# Altium PCB main.PcbDoc
Units mil, origin at the board's own origin, x right, y up, seen from the top; angles counter-clockwise.
Board outline 6000 x 4000 mil, 2 copper layers (Top Layer, Bottom Layer); 46 components, 28 nets, 221 pads, 4 vias.
Unrouted connection lines stored in the file: 115.
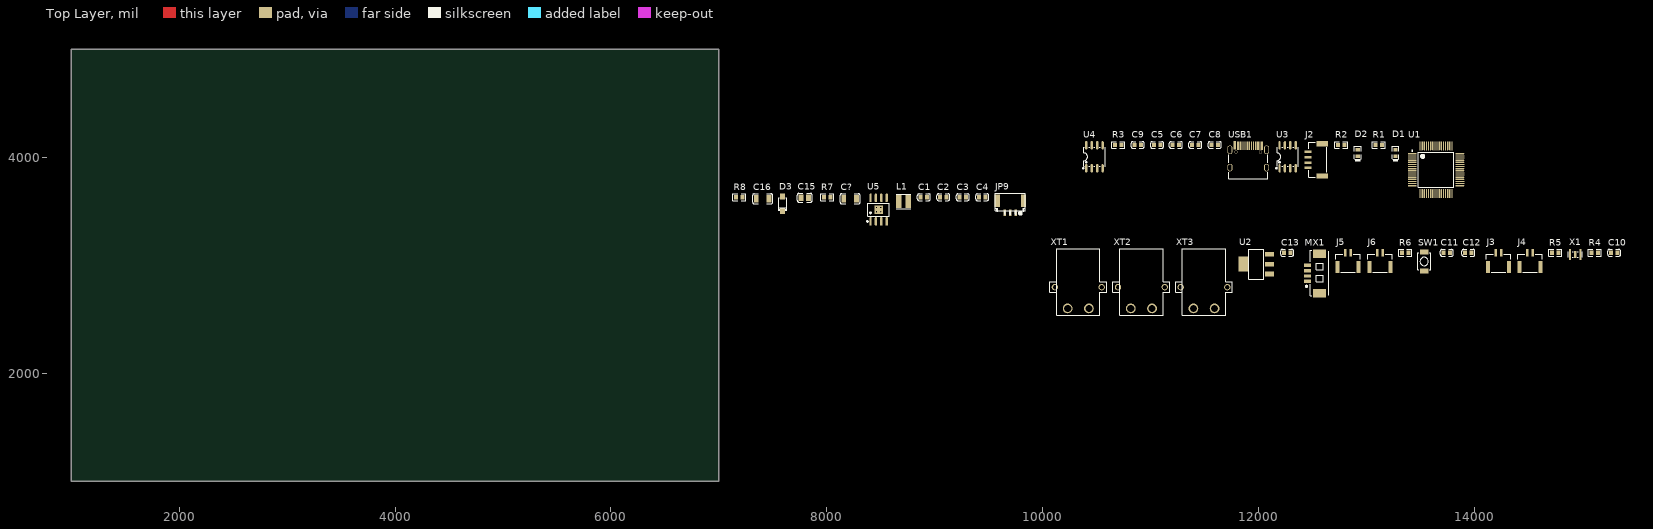
[diagram p0: Top Layer view]
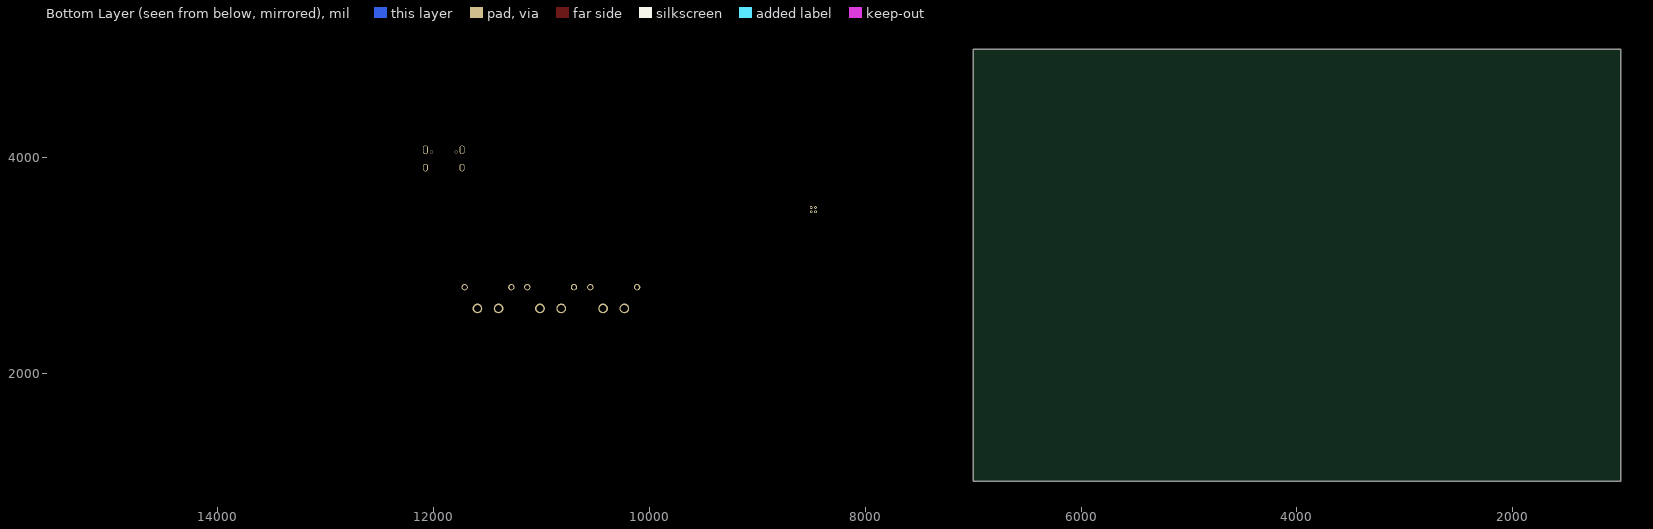
[diagram p1: Bottom Layer view, seen from below]

## Layer stack, top to bottom
Top Solder: solder mask 0.4, Solder Resist, Dk 3.5
Top Layer: signal copper 1.4
Dielectric 1: dielectric 12.6, FR-4, Dk 4.8
Bottom Layer: signal copper 1.4
Bottom Solder: solder mask 0.4, Solder Resist, Dk 3.5

## Board outline
1000,1000 7000,1000 7000,5000 1000,5000

## Design rules (kind name [scope] priority, off if disabled: settings)
Clearance [All] p1: gap=10 ignorepadtopadclearanceinfootprint=FALSE except(0: Arc-Hole Track-Hole SMDPad-Hole THPad-Hole Via-Hole Fill-Hole Poly-Hole Region-Hole Text-Hole)
DiffPairsRouting [All] p1: maxlimit=10 minlimit=10 mostfreqgap=10 toplayer_minwidth=15 toplayer_maxwidth=15 toplayer_prefwidth=15 bottomlayer_minwidth=15 bottomlayer_maxwidth=15 bottomlayer_prefwidth=15 maxuncoupledlength=500
PolygonConnect [All] p1: connectstyle=Relief reliefconductorwidth=10 reliefentries=4 polygonreliefangle="90 Angle" airgapwidth=10
RoomDefinition main [InComponentClass('main')] p1: confinementstyle=ConfineOut formatcopy=TRUE lockcomponents=FALSE outline 7149.96,1465 18869.96,1465 18869.96,2195 7149.96,2195
RoutingVias [All] p1: holewidth=28 width=50 viastyle="Through Hole" minholewidth=28 minwidth=50 maxholewidth=28 maxwidth=50
SolderMaskExpansion [All] p1: expansion=4 istentingtop=FALSE
Width [All] p1: maxlimit=10 minlimit=10 preferedwidth=10
29 further rules are at their usual default settings.

## Classes and differential pairs
differential pair SW: +SW_P -SW_N
differential pair CAN2: +CAN2_P -CAN2_N

## Components (designator, comment, footprint, x,y, rotation, side; value= is the part's Value field where it differs from the comment)
C1 "10uF (106) 10% 10V" 0603_C 8899.96,3630 r0 top
C2 "100nF (104) 10% 50V" 0603_C 9079.96,3630 r0 top
C3 "10uF (106) 10% 10V" 0603_C 9259.96,3630 r0 top
C4 "100nF (104) 10% 50V" 0603_C 9439.96,3630 r0 top
C5 "2.2uF (225) 10% 16V" 0603_C 11059.96,4115 r0 top
C6 "2.2uF (225) 10% 16V" 0603_C 11234.96,4115 r0 top
C7 "2.2uF (225) 10% 16V" 0603_C 11414.96,4115 r0 top
C8 "2.2uF (225) 10% 16V" 0603_C 11594.96,4115 r0 top
C9 "100nF (104) 10% 50V" 0603_C 10879.96,4115 r0 top
C10 "100nF (104) 10% 50V" 0603_C 15294.96,3115 r0 top
C11 "2.2uF (225) 10% 16V" 0603_C 13744.96,3115 r0 top
C12 "2.2uF (225) 10% 16V" 0603_C 13944.96,3115 r0 top
C13 "100nF (104) 10% 50V" 0603_C 12264.96,3115 r0 top
C15 "22uF (226) 20% 25V" 0805_C 7794.96,3625 r0 top
C16 "10uF (106) 10% 50V" 1206_C 7404.96,3615 r0 top
C? "10uF (106) 10% 50V" 1206_C 8214.96,3615 r0 top
D1 "白灯 0603" 0603_LED_S1 13269.96,4040 r90 top
D2 "白灯 0603" 0603_LED_S1 12919.96,4040 r90 top
D3 "DSK210_C713647" SOD-123FL_L2.7-W1.8-LS3.8-RD 7589.96,3570 r90 top
J2 "GH1.25-4P" GH1.25-4P 12554.96,3965 r0 top
J3 "GH1.25立贴2P" CONN-SMD_2P-V-P1.25-L_X1251WVS-02HF-LPSW 14224.96,3050 r0 top
J4 "GH1.25立贴2P" CONN-SMD_2P-V-P1.25-L_X1251WVS-02HF-LPSW 14514.96,3050 r0 top
J5 "GH1.25立贴2P" CONN-SMD_2P-V-P1.25-L_X1251WVS-02HF-LPSW 12829.96,3050 r0 top
J6 "GH1.25立贴2P" CONN-SMD_2P-V-P1.25-L_X1251WVS-02HF-LPSW 13124.96,3050 r0 top
JP9 "下载口3P" GH1.25-WS-3P 9699.96,3585 r0 top
L1 "100uH" IND-SMD_L3.5-W3.0_SLF0302 8709.96,3590 r0 top
MX1 "MX1.25-4P" CONN-SMD_4P-1.25P_1.25T-4P 12564.96,2925 r90 top
R1 "1KΩ (1001) ±1%" 0603_R 13114.96,4115 r0 top
R2 "1KΩ (1001) ±1%" 0603_R 12764.96,4115 r0 top
R3 "120Ω (1200) ±1%" 0603_R 10699.96,4115 r0 top
R4 "120Ω (1200) ±1%" 0603_R 15114.96,3115 r0 top
R5 "1KΩ (1001) ±1%" 0603_R 14749.96,3115 r0 top
R6 "1KΩ (1001) ±1%" 0603_R 13359.96,3115 r0 top
R7 "10KΩ (1002) ±1%" 0603_R 8004.96,3630 r0 top
R8 "3.3KΩ (3301) ±1%" 0603_R 7189.96,3630 r0 top
SW1 "TSA343G00-250J2" SW-SMD_L4.0-W2.9-LS5.0 13534.96,3035 r90 top
U1 "STM32F405RGT6" TQFP64_M 13644.96,3885 r0 top
U2 "AMS1117" SOT-223_L6.7-W3.5-P2.30-BR 11979.96,3010 r0 top
U3 "TJA1050" SOIC-8_L5.0-W4.0-P1.27-LS6.0-BL 12269.96,4005 r0 top
U4 "TJA1050" SOIC-8_L5.0-W4.0-P1.27-LS6.0-BL 10479.96,4005 r0 top
U5 "XL7005A" SOIC-8_L5.0-W4.0-P1.27-LS6.0-BL-EP2.0 8479.96,3515 r0 top
USB1 "Type-c-16p" USB-C-SMD_KH-TYPE-C-16P 11904.96,4000 r0 top
X1 "8MHz" OSC-SMD_3P-L3.2-W1.3-P1.2-L 14934.96,3100 r0 top
XT1 "XT30 PW-F" "XT30 PW-F" 10329.96,2600 r0 top
XT2 "XT30 PW-F" "XT30 PW-F" 10914.96,2600 r0 top
XT3 "XT30 PW-F" "XT30 PW-F" 11494.96,2600 r0 top

## Footprints (in the part's own frame and the unit in brackets; to place one, negate y for a bottom-side part, rotate by r counter-clockwise, add the part's x,y. Pads: shape width x height; smd on the part's side, far side on the other; paste and mask are expansions set on the pad)
0603_C [mm]
  rect 0.93x0.98 smd: 1(-0.77,0) 2(0.77,0)
  silkscreen extent -1.53,-0.79 1.54,0.79, body extent -0.8,-0.4 0.8,0.4, height 0.3
0603_LED_S1 [mm]
  rect 0.93x0.98 smd: A(0.77,0) K(-0.77,0)
  silkscreen extent -1.98,-0.79 1.54,0.79, body extent -0.8,-0.4 0.8,0.4, height 0.6
0603_R [mm]
  rect 0.93x0.98 smd: 1(-0.77,0) 2(0.77,0)
  silkscreen extent -1.53,-0.79 1.54,0.79, body extent -0.85,-0.4 0.85,0.4, height 0.56
0805_C [mm]
  rect 1.16x1.47 smd: 1(-0.89,0) 2(0.89,0)
  silkscreen extent -1.77,-1.04 1.77,1.04, body extent -1,-0.62 1,0.63, height 0.77
1206_C [mm]
  rect 1.13x1.8 smd: 1(-1.49,0) 2(1.49,0)
  silkscreen extent -2.36,-1.2 2.35,1.2, body extent -1.6,-0.81 1.6,0.79, height 1
CONN-SMD_2P-V-P1.25-L_X1251WVS-02HF-LPSW [mm]
  rect 0.6x1.7 smd: 1(-0.625,1.675) 2(0.625,1.675)
  rect 1x2.8 smd: 3(2.475,-1.675) 4(-2.475,-1.675)
  silkscreen extent -2.9,-2.9 2.9,1.27, body extent -2.87,-3.04 2.88,1.96, height 4.1
CONN-SMD_4P-1.25P_1.25T-4P [mm]
  rect 2x3 smd: 0(-4.632,0) 0(4.632,0)
  rect 0.8x1.6 smd: 1(-1.889,2.811) 2(-0.639,2.811) 3(0.611,2.811) 4(1.861,2.811)
  silkscreen extent -5.23,-2.23 5.45,3.25, body extent -5.15,-1.96 5,3.23, height 3.4
GH1.25-4P [mm]
  rect 2.8x1.2 smd: 0(0.907,-3.554) 0(0.907,4.085)
  rect 1.7x0.6 smd: 1(-2.443,2.149) 2(-2.443,0.9) 3(-2.443,-0.351) 4(-2.443,-1.601)
  silkscreen extent -2.32,-3.78 1.98,4.44, body extent -2.92,-3.87 1.93,4.38, height 4.25
GH1.25-WS-3P [mm] "A1257WR-S-3P"
  rect 1.2x3 smd: 0(-3.075,0.3) 0(3.075,0.3)
  rect 0.6x1.5 smd: 1(1.25,-2.5) 2(0,-2.5) 3(-1.25,-2.5)
  silkscreen extent -3.5,-2.93 3.5,2.05, body extent -3.5,-2.8 3.5,2.1, height 4.4
IND-SMD_L3.5-W3.0_SLF0302 [mm]
  rect 1.25x3 smd: 1(-1.125,0) 2(1.125,0)
  silkscreen extent -1.75,-1.7 1.75,1.7, body extent -2,-2.02 2,1.98, height 1
OSC-SMD_3P-L3.2-W1.3-P1.2-L [mm]
  rect 0.5x2.5 smd: 1(-1.199,0) 3(1.199,0)
  rect 0.5x1.6 smd: 2(0,0)
  silkscreen extent -1.6,-0.65 1.6,0.65, body extent -1.6,-0.66 1.6,0.66, height 0.7
SOD-123FL_L2.7-W1.8-LS3.8-RD [mm]
  rect 1.4x1.2 smd: 1(-1.735,0) 2(1.735,0)
  silkscreen extent -1.6,-1 1.38,1, body extent -1.95,-0.85 1.8,0.85, height 1.2
SOIC-8_L5.0-W4.0-P1.27-LS6.0-BL [mil]
  oval 22.38x76.78 smd: 1(-75,-106.5) 2(-25,-106.5) 3(25,-106.5) 4(75,-106.5) 5(75,106.5) 6(25,106.5) 7(-25,106.5) 8(-75,106.5)
  silkscreen extent -110,-112 98,87, body extent -99,-120 99,118, height 63
SOIC-8_L5.0-W4.0-P1.27-LS6.0-BL-EP2.0 [mm]
  oval 0.574x2.038 smd: 1(-1.905,-2.769) 2(-0.635,-2.769) 3(0.635,-2.769) 4(1.905,-2.769) 5(1.905,2.769) 6(0.635,2.769) 7(-0.635,2.769) 8(-1.905,2.769)
  rect 2x2 smd: 9(0,0)
  silkscreen extent -2.79,-2.92 2.53,1.52, body extent -2.51,-3.05 2.51,3, height 1.6
SOT-223_L6.7-W3.5-P2.30-BR [mm]
  rect 2.2x1.1 smd: 1(3.099,-2.3) 2(3.099,0) 3(3.099,2.3)
  rect 2.2x3.5 smd: 4(-3.099,0)
  silkscreen extent -1.8,-3.55 1.8,3.55, body extent -3.5,-3.25 3.5,3.25, height 1.65
SW-SMD_L4.0-W2.9-LS5.0 [mm]
  rect 1.2x2 smd: 1(-2.25,0) 2(2.25,0)
  silkscreen extent -2,-1.5 2,1.5, body extent -2.45,-1.45 2.45,1.45, height 2
TQFP64_M [mm] "Thin QFP, 64-Leads, Body 10x10mm, Pitch 0.5mm, IPC Low Density"
  oval 2.1x0.3 smd: 1(-5.6,3.75) 2(-5.6,3.25) 3(-5.6,2.75) 4(-5.6,2.25) 5(-5.6,1.75) 6(-5.6,1.25) 7(-5.6,0.75) 8(-5.6,0.25) 9(-5.6,-0.25) 10(-5.6,-0.75) 11(-5.6,-1.25) 12(-5.6,-1.75) 13(-5.6,-2.25) 14(-5.6,-2.75) 15(-5.6,-3.25) 16(-5.6,-3.75) 33(5.6,-3.75) 34(5.6,-3.25) 35(5.6,-2.75) 36(5.6,-2.25) 37(5.6,-1.75) 38(5.6,-1.25) 39(5.6,-0.75) 40(5.6,-0.25) 41(5.6,0.25) 42(5.6,0.75) 43(5.6,1.25) 44(5.6,1.75) 45(5.6,2.25) 46(5.6,2.75) 47(5.6,3.25) 48(5.6,3.75)
  oval 0.3x2.1 smd: 17(-3.75,-5.6) 18(-3.25,-5.6) 19(-2.75,-5.6) 20(-2.25,-5.6) 21(-1.75,-5.6) 22(-1.25,-5.6) 23(-0.75,-5.6) 24(-0.25,-5.6) 25(0.25,-5.6) 26(0.75,-5.6) 27(1.25,-5.6) 28(1.75,-5.6) 29(2.25,-5.6) 30(2.75,-5.6) 31(3.25,-5.6) 32(3.75,-5.6) 49(3.75,5.6) 50(3.25,5.6) 51(2.75,5.6) 52(2.25,5.6) 53(1.75,5.6) 54(1.25,5.6) 55(0.75,5.6) 56(0.25,5.6) 57(-0.25,5.6) 58(-0.75,5.6) 59(-1.25,5.6) 60(-1.75,5.6) 61(-2.25,5.6) 62(-2.75,5.6) 63(-3.25,5.6) 64(-3.75,5.6)
  silkscreen extent -5.72,-4.15 4.15,4.57, body extent -6.07,-6.07 6.07,6.07, height 1.62
USB-C-SMD_KH-TYPE-C-16P [mm]
  oval 1.2x2 hole 0.7 slot 1.7 at 90 deg: 1(-4.32,1.765) 2(4.32,1.765)
  oval 1.2x1.8 hole 0.7 slot 1.4 at 90 deg: 3(-4.32,-2.415) 4(4.32,-2.415)
  rect 0.3x2 smd: A1(-3.353,2.794) A4(-2.55,2.778) A5(-1.25,2.778) A6(-0.25,2.778) A7(0.25,2.778) A8(1.25,2.778) A9(2.55,2.778) A12(3.35,2.778) B1(3.05,2.778) B4(2.25,2.778) B5(1.75,2.778) B6(0.75,2.778) B7(-0.75,2.778) B8(-1.75,2.778) B9(-2.25,2.778) B12(-3.048,2.794)
  round 0.7 hole 0.7 unplated: ""(-2.89,1.235) ""(2.89,1.235)
  silkscreen extent -4.57,-5.08 4.57,0.57, body extent -4.47,-5.06 4.47,2.84, height 3.26
"XT30 PW-F" [mm]
  round 2.3 hole 1.7: 1(2.5,0) 2(-2.5,0)
  round 1.5 hole 1: ""(-5.5,5) ""(5.5,5)
  silkscreen extent -6.7,-1.59 6.7,14.05, body extent -6.65,-1.02 6.65,13.88, height 5

## Part data
C1 C3: library part "0603 10uF (106) 10% 10V", "贴片电容", Package=0603, SuppliersPartNumber=C19702, ComponentLink1Description=供应商链接, ComponentLink1URL=http://www.szlcsc.com/product/details_20411.html, Supplier=LC
C2 C4 C9 C10 C13: library part "0603 100nF (104) 10% 50V", "贴片电容", Package=0603, SuppliersPartNumber=C14663, ComponentLink1Description=供应商链接, ComponentLink1URL=http://www.szlcsc.com/product/details_15331.html, Supplier=LC
C5 C6 C7 C8 C11 C12: library part "0603 2.2uF (225) 10% 16V", "贴片电容", Package=0603, SuppliersPartNumber=C23630, ComponentLink1Description=供应商链接, ComponentLink1URL=http://www.szlcsc.com/product/details_24366.html, Supplier=LC
C15: library part "0805 22uF (226) 20% 25V", "贴片电容", Package=0805, SuppliersPartNumber=C45783, ComponentLink1Description=供应商链接, ComponentLink1URL=http://www.szlcsc.com/product/details_46786.html, Supplier=LC
C16 C?: library part "1206 10uF (106) 10% 50V", "贴片电容", Package=1206, SuppliersPartNumber=C13585, ComponentLink1Description=供应商链接, ComponentLink1URL=http://www.szlcsc.com/product/details_14236.html, Supplier=LC
D1 D2: library part "0603 白灯", "发光二极管", Package=0603, SuppliersPartNumber=C2290, ComponentLink1Description=供应商链接, ComponentLink1URL=http://www.szlcsc.com/product/details_2663.html, Supplier=LC
D3: BOM_JLCPCB Part Class="Extended Part", BOM_Manufacturer=LGE, BOM_Manufacturer Part=DSK210, BOM_Supplier=LCSC, BOM_Supplier Part=C713647, Contributor=LCSC, spicePre=D, spiceSymbolName=DSK210_C713647
J2: "GH1.25-4P 卧"
JP9: library part 接插件-下载口3P, "下载口3P SWD"
L1: BOM_JLCPCB Part Class="Extended Part", BOM_Manufacturer=Sunltech, BOM_Manufacturer Part=SLF0302-101KTT, BOM_Supplier=LCSC, BOM_Supplier Part=C182197, Contributor=LCSC, nameAlias=Inductance, spicePre=L, spiceSymbolName=SLF0302-101KTT
R1 R2 R5 R6: library part "0603 1KΩ (1001) 1%", "贴片电阻", Package=0603, SuppliersPartNumber=C21190, ComponentLink1Description=供应商链接, ComponentLink1URL=http://www.szlcsc.com/product/details_21904.html, Supplier=LC
R3 R4: library part "0603 120Ω (1200) 1%", "贴片电阻", Package=0603, SuppliersPartNumber=C22787, ComponentLink1Description=供应商链接, ComponentLink1URL=http://www.szlcsc.com/product/details_23514.html, Supplier=LC
R7: library part "0603 10KΩ (1002) 1%", "贴片电阻", Package=0603, SuppliersPartNumber=C25804, ComponentLink1Description=供应商链接, ComponentLink1URL=http://www.szlcsc.com/product/details_26547.html, Supplier=LC
R8: library part "0603 3.3KΩ (3301) 1%", "贴片电阻", Package=0603, SuppliersPartNumber=C22978, ComponentLink1Description=供应商链接, ComponentLink1URL=http://www.szlcsc.com/product/details_23705.html, Supplier=LC
SW1: "贴片轻触开关", BOM_Manufacturer=BRIGHT, BOM_Manufacturer Part=TSA343G00-250J2, BOM_Supplier=LCSC, BOM_Supplier Part=C354946, Contributor=LCSC, spicePre=S, spiceSymbolName=TSA343G00-250J2
U1: "ARM Cortex-M4 32b MCU+FPU, 210DMIP, 1024 kB Flash, 192+4 kB RAM, 51 I/Os, 64-pin LQFP, -40 to +85癈, Tray", Operating Frequency (Processor Speed)=168MHz, 16-bit Timers (IC/OC/PWM)=12x16-bit(24/24/30), 32-bit Timer (IC/OC/PWM)="2x32-bit (8/8/8)", A/D Converter=16x12-bit, ComponentLink1Description="Manufacturer URL", ComponentLink1URL=http://www.st.com/, ComponentLink2Description="STM32F405/7 Datasheet", ComponentLink2URL=http://www.st.com/internet/com/TECHNICAL_RESOURCES/TECHNICAL_LITERATURE/DATASHEET/DM00037051.pdf, ComponentLink3Description="STM32F4 Web Page", ComponentLink3URL=http://www.st.com/internet/mcu/subclass/1521.jsp, D/A Converter=2x12-bit, DatasheetVersion="rev2, Jan-2012", Internal RAM=192kB, Other Timer Functions="2xWDG, RTC, 24-bit down counter", PackageDescription="64-Pin Low Profile Quad Flat Package, 10x10 mm Body, 0.5 mm Pitch", PackageReference=TQFP64, PackageVersion=2012, Serial Interface="3xSPI/2xI2S/2xI2C/3xUSART(IrDa, ISO7816)/3xUART/1xUSB OTG FS/HS, 2xCAN/ SDIO"
U5: BOM_JLCPCB Part Class="Extended Part", BOM_Manufacturer=XLSEMI, BOM_Manufacturer Part=XL7005A, BOM_Supplier=LCSC, BOM_Supplier Part=C50848, spicePre=U, spiceSymbolName=XL7005A
X1: library part 8MHz-3P, BOM_JLCPCB SMD=Yes, BOM_Manufacturer=MuRata, BOM_Manufacturer Part=CSTCE8M00G15C99-R0, BOM_Supplier=LCSC, BOM_Supplier Part=C110614, nameAlias=Frequency, SMT Type=Extend, spicePre=X, spiceSymbolName=CSTCE8M00G15C99-R0

## Via types
v1: diameter 24, hole 12, Top Layer to Bottom Layer, 4 vias

## Nets (pads, with @x,y where several pads share a name; then routed paths per layer and width w, separated by ;. In a path a pad name is that pad's centre, name@x,y a point inside that pad or via, vN(x,y) a via of type N, cw(c..) or ccw(c..) an arc to the next point about the centre after c; other vN are vias at no path point)
+5: C1.2 C2.1 C9.2 C10.2 C15.2 C?.2 J2.1 JP9.2 L1.2 R7.2 U2.3 U3.3 U4.3
CAN1_H: J3.1 J4.1 J5.1 J6.1 R3.2 U3.7
CAN1_L: J3.2 J4.2 J5.2 J6.2 R3.1 U3.6
CAN1_R: U1.61 U3.4
CAN1_T: U1.62 U3.1
CAN2_H: J2.3 R4.2 U4.7
CAN2_L: J2.4 R4.1 U4.6
CAN2_N: USB1.A7 USB1.B7
CAN2_P: USB1.A6 USB1.B6
CAN2_R: U1.57 U4.4
CAN2_T: U1.58 U4.1
DCBUS: C16.2 U5.1 XT1.1 XT2.1 XT3.1
GND: C1.1 C2.2 C3.1 C4.2 C5.1 C6.1 C7.1 C8.1 C9.1 C10.1 C11.1 C12.1 C13.1 C15.1 C16.1 D1.K D3.2 J2.2 JP9.3 MX1.3 R5.1 R8.1 SW1.2 U1.12 U1.18 U1.63 U2.1 U3.2 U3.8 U4.2 U4.8 U5.4 U5.5 U5.6 U5.7 U5.8 U5.9 USB1.A1 USB1.A12 USB1.B1 USB1.B12 X1.2 XT1.2 XT2.2 XT3.2
  other v1: 8460.28,3495.31 8499.65,3495.31 8460.28,3534.68 8499.65,3534.68
LED1: D2.K U1.14
NetC11_2: C11.2 U1.31
NetC12_2: C12.2 U1.47
NetC?_1: C?.1 R7.1 R8.2 U5.3
NetD1_A: D1.A R1.2
NetD2_A: D2.A R2.2
NetD3_1: D3.1 L1.1 U5.2
NetR5_2: R5.2 U1.60
NetU1_5: U1.5 X1.1
NetU1_6: U1.6 X1.3
NRST: C13.2 R6.2 SW1.1 U1.7
PA3: JP9.1 U1.17
SW_N: MX1.1 U1.49
SW_P: MX1.2 U1.46
VCC: C3.2 C4.1 C5.2 C6.2 C7.2 C8.2 MX1.4 R1.1 R2.1 R6.1 U1.1 U1.13 U1.19 U1.32 U1.48 U1.64 U2.2
pads on no net: J2.0 J3.3 J3.4 J4.3 J4.4 J5.3 J5.4 J6.3 J6.4 JP9.0 MX1.0 U1.2 U1.3 U1.4 U1.8 U1.9 U1.10 U1.11 U1.15 U1.16 U1.20 U1.21 U1.22 U1.23 U1.24 U1.25 U1.26 U1.27 U1.28 U1.29 U1.30 U1.33 U1.34 U1.35 U1.36 U1.37 U1.38 U1.39 U1.40 U1.41 U1.42 U1.43 U1.44 U1.45 U1.50 U1.51 U1.52 U1.53 U1.54 U1.55 U1.56 U1.59 U2.4 U3.5 U4.5 USB1. USB1.1 USB1.2 USB1.3 USB1.4 USB1.A4 USB1.A5 USB1.A8 USB1.A9 USB1.B4 USB1.B5 USB1.B8 USB1.B9 XT1. XT2. XT3.